# EAGLE board projetElec_groupe1 (EAGLE 8.3.1)
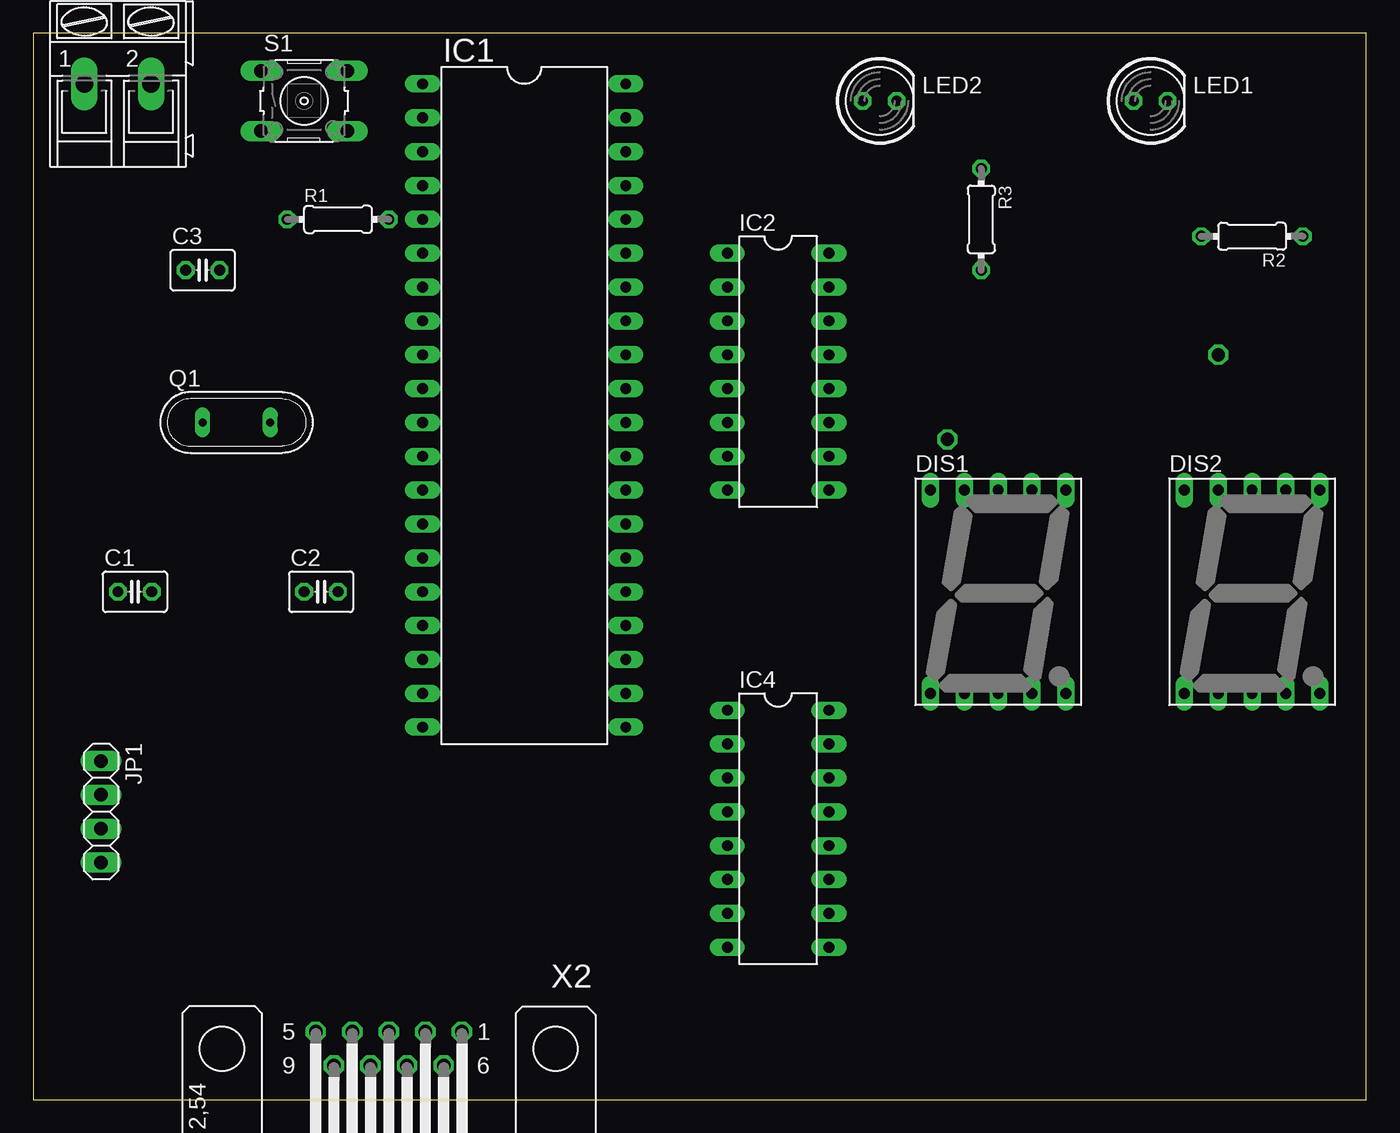
[diagram p0: board, top side]
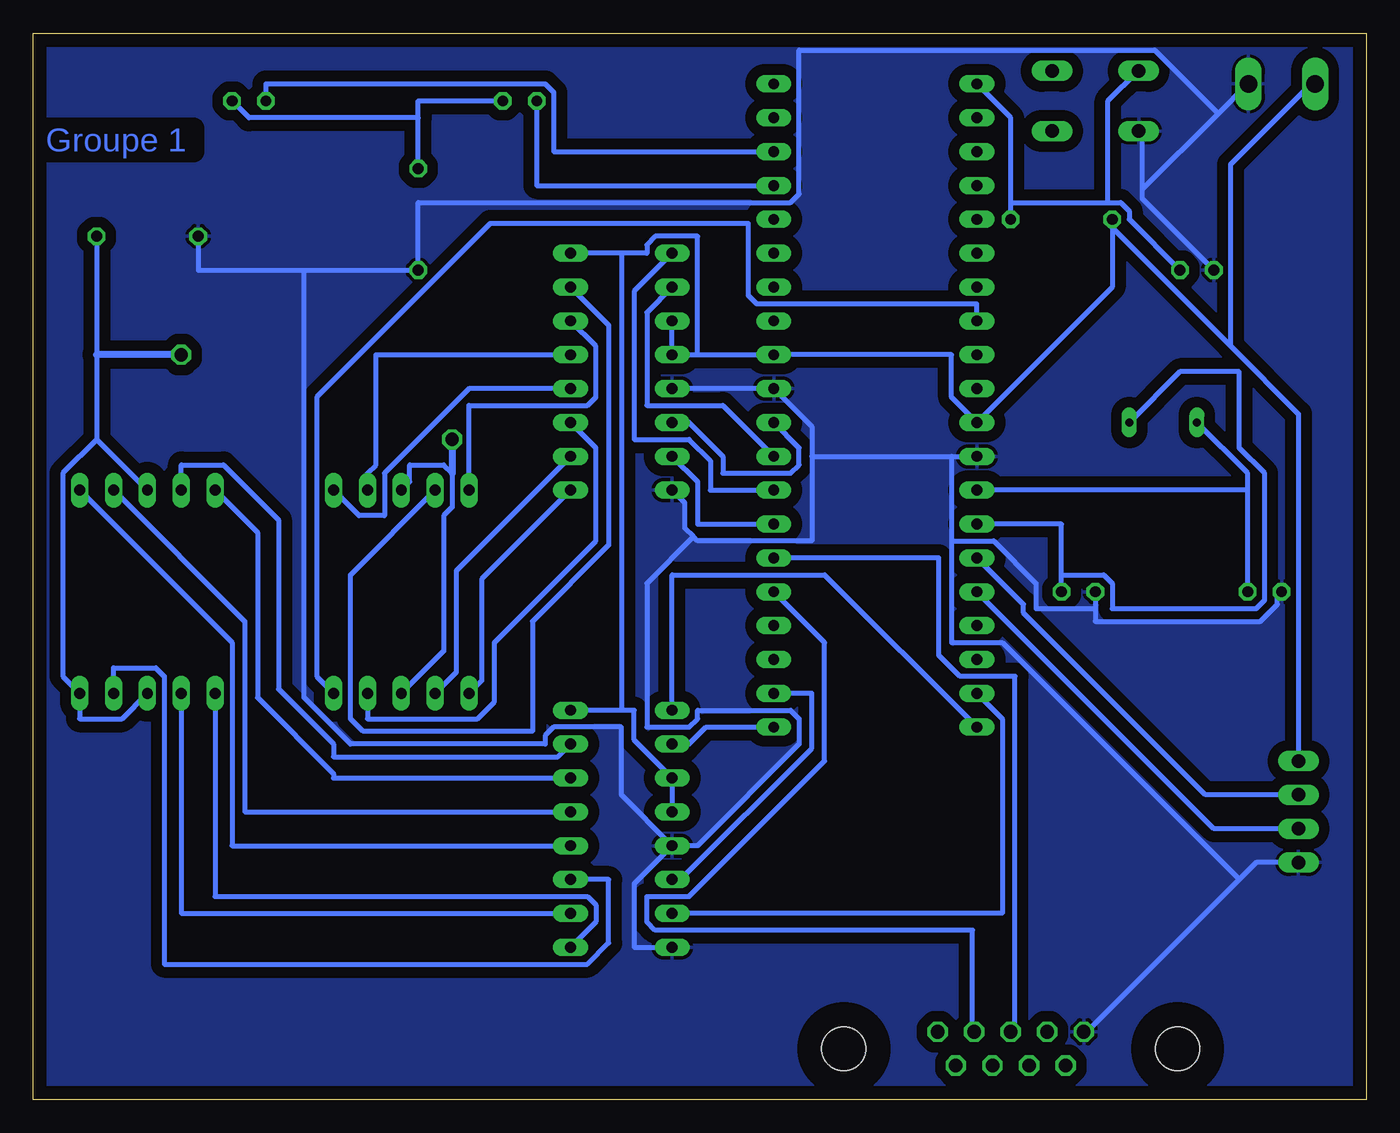
[diagram p1: board, bottom side, seen from below]

Size 100 x 80 mm. Coordinates in mm from the lower left corner, seen from the top.
Outline: 0,0 100,0 100,80 0,80 0,0
Copper layers (1*16): Top 0.035mm / dielectric 1.5mm / Bottom 0.035mm
Design rules "default *": minimum track width 15mil, minimum drill 0.35mm, track to track 15mil, track to pad 15mil, pad to pad 15mil, via to via 15mil, smd to smd 6mil, copper to edge 40mil, drill to drill 6mil, minimum pad ring 10mil, minimum via ring 8mil, stop-mask expansion 4mil, vias tented up to drill 0mil, thermal gap 10mil

## Footprints (pad centres in the part's own frame; a part is rotated, then mirrored left to right if it is on the bottom)
C025-030X050 = drill 0.813 octagon: 1 -1.27,0; 2 1.27,0
HDSP-M = drill 0.813 long: 1 -5.08,-7.62; 2 -2.54,-7.62; 3 0,-7.62; 4 2.54,-7.62; 5 5.08,-7.62; 6 5.08,7.62; 7 2.54,7.62; 8 0,7.62; 9 -2.54,7.62; 10 -5.08,7.62
DIL40 = drill 0.813 long: 1 -24.13,-7.62; 2 -21.59,-7.62; 3 -19.05,-7.62; 4 -16.51,-7.62; 5 -13.97,-7.62; 6 -11.43,-7.62; 7 -8.89,-7.62; 8 -6.35,-7.62; 9 -3.81,-7.62; 10 -1.27,-7.62; 11 1.27,-7.62; 12 3.81,-7.62; 13 6.35,-7.62; 14 8.89,-7.62; 15 11.43,-7.62; 16 13.97,-7.62; 17 16.51,-7.62; 18 19.05,-7.62; 19 21.59,-7.62; 20 24.13,-7.62; 21 24.13,7.62; 22 21.59,7.62; 23 19.05,7.62; 24 16.51,7.62; 25 13.97,7.62; 26 11.43,7.62; 27 8.89,7.62; 28 6.35,7.62; 29 3.81,7.62; 30 1.27,7.62; 31 -1.27,7.62; 32 -3.81,7.62; 33 -6.35,7.62; 34 -8.89,7.62; 35 -11.43,7.62; 36 -13.97,7.62; 37 -16.51,7.62; 38 -19.05,7.62; 39 -21.59,7.62; 40 -24.13,7.62
DIL16 = drill 0.813 long: 1 -8.89,-3.81; 2 -6.35,-3.81; 3 -3.81,-3.81; 4 -1.27,-3.81; 5 1.27,-3.81; 6 3.81,-3.81; 7 6.35,-3.81; 8 8.89,-3.81; 9 8.89,3.81; 10 6.35,3.81; 11 3.81,3.81; 12 1.27,3.81; 13 -1.27,3.81; 14 -3.81,3.81; 15 -6.35,3.81; 16 -8.89,3.81
1X04 = drill 1.016 long: 1 -3.81,0; 2 -1.27,0; 3 1.27,0; 4 3.81,0
LED5MM = drill 0.813 octagon: A -1.27,0; K 1.27,0
QS = drill 0.61 long: 1 -2.54,0; 2 2.54,0
0204/7 = drill 0.813 octagon: 1 -3.81,0; 2 3.81,0
B3F-10XX = drill 1.016 long: 1 -3.251,2.261; 2 3.251,2.261; 3 -3.251,-2.261; 4 3.251,-2.261
AK300/2 = drill 1.321 long: 1 -2.515,0; 2 2.489,0
F09H = drill 1.016 octagon: 1 -5.486,-1.27; 2 -2.743,-1.27; 3 0,-1.27; 4 2.743,-1.27; 5 5.486,-1.27; 6 -4.115,1.27; 7 -1.372,1.27; 8 1.372,1.27; 9 4.115,1.27 | hole 3.302: -12.522,0; 12.522,0

## Placement (x,y rotation side)
C1  [C025-030X050]  7.62,38.1 0 top
C2  [C025-030X050]  21.59,38.1 0 top
C3  [C025-030X050]  12.7,62.23 0 top
DIS1  HD-H101  [HDSP-M]  72.39,38.1 0 top
DIS2  HD-H101  [HDSP-M]  91.44,38.1 0 top
IC1  PIC16F877P  [DIL40]  36.83,52.07 270 top
IC2  [DIL16]  55.88,54.61 270 top
IC4  [DIL16]  55.88,20.32 270 top
JP1  [1X04]  5.08,21.59 270 top
LED1  [LED5MM]  83.82,74.93 0 top
LED2  [LED5MM]  63.5,74.93 0 top
Q1  [QS]  15.24,50.8 0 top
R1  [0204/7]  22.86,66.04 0 top
R2  [0204/7]  91.44,64.77 180 top
R3  [0204/7]  71.12,66.04 270 top
S1  [B3F-10XX]  20.32,74.93 0 top
X1  [AK300/2]  6.35,76.2 0 top
X2  [F09H]  26.67,3.81 180 top

## Library data of the parts
C1-C3 R1-R3 = resistor
DIS1 DIS2 = display-hp; OC_FARNELL: unknown; OC_NEWARK: unknown
IC1 = microchip; MF: MICROCHIP; MPN: PIC16F877-04/P; OC_FARNELL: 9761349; OC_NEWARK: 61K3463
IC2 IC4 = ic-package
JP1 = pinhead
LED1 LED2 = led
Q1 = special
S1 = switch-omron; MPN: B3F-1000; OC_FARNELL: 176432; OC_NEWARK: 36M3542
X1 = con-ptr500; OC_FARNELL: unknown; OC_NEWARK: unknown
X2 = con-subd; OC_FARNELL: unknown; OC_NEWARK: unknown

## Nets
GND: C1.1 C2.1 C3.1 IC1.12 IC1.31 IC2.5 IC2.8 IC4.5 IC4.8 JP1.4 R2.2 R3.2 S1.3 X1.2 X2.5
N$1: C1.2 IC1.13 Q1.1
N$2: C2.2 IC1.14 Q1.2
N$3: C3.2 IC1.1 R1.2 S1.1
N$4: IC1.38 LED1.A
N$5: LED1.K LED2.K R3.1
N$6: IC1.37 LED2.A
N$7: IC1.15 JP1.2
N$8: IC1.16 JP1.3
N$9: DIS1.10 IC2.14
N$10: IC1.25 X2.2
N$11: IC1.26 X2.3
N$12: IC1.28 IC2.1
N$13: IC1.29 IC2.2
N$14: IC1.30 IC2.6
N$15: DIS1.7 IC2.13
N$16: IC1.20 IC4.1
N$18: IC1.27 IC2.7
N$19: DIS1.6 IC2.12
N$20: DIS1.4 IC2.11
N$21: DIS1.2 IC2.10
N$22: DIS1.1 IC2.9
N$23: DIS1.5 IC1.8
N$24: DIS2.3 DIS2.5 DIS2.8 R2.1
N$25: DIS1.3 DIS1.8
N$27: DIS1.9 IC2.15
N$28: IC1.19 IC4.7
N$29: IC1.21 IC4.2
N$30: IC1.22 IC4.6
N$31: DIS2.7 IC4.13
N$33: DIS2.6 IC4.12
N$34: DIS2.4 IC4.11
N$35: DIS2.2 IC4.10
N$36: DIS2.1 IC4.9
N$37: DIS2.10 IC4.14
N$38: DIS2.9 IC4.15
VCC: IC1.11 IC1.32 IC2.3 IC2.4 IC2.16 IC4.3 IC4.4 IC4.16 JP1.1 R1.1 X1.1

## Tracks (layer width: path | path; a pad name or v marks a point on that pad's centre or on a via)
GND
  Bottom 0.381: 9.53,16.51 8.26,17.78 JP1.4 | 9.53,16.51 20.95,5.08 X2.5 | C3.1 16.83,67.63 16.83,68.26 | 16.83,68.26 16.83,72.39 S1.3 | 16.83,68.26 11.11,73.98 | 11.11,73.98 8.89,76.2 X1.2 | 79.69,62.23 87.63,62.23 R2.2 | 79.69,62.23 R3.2 71.12,67.31 43.18,67.31 42.55,67.94 42.55,78.74 15.88,78.74 11.11,73.98 | C1.1 6.67,37.78 6.67,37.15 7.94,35.88 20.32,35.88 20.32,36.83 | C2.1 20.32,36.83 | IC4.8 54.93,11.43 54.93,16.19 IC4.5 | IC2.8 51.12,44.77 51.12,42.86 50.48,42.23 | 50.48,42.23 50.16,41.91 41.59,41.91 41.59,48.26 | 41.59,48.26 41.59,50.48 IC1.31 IC2.5 | 41.59,48.26 31.11,48.26 | 31.11,48.26 IC1.12 | IC4.5 50.16,19.05 42.55,26.67 42.55,28.57 43.18,29.21 50.16,29.21 50.16,28.57 50.8,27.94 53.98,27.94 53.98,38.73 50.48,42.23 | 20.32,36.83 24.77,36.83 24.77,38.73 27.94,41.91 31.11,41.91 | 31.11,48.26 31.11,41.91 | 79.69,62.23 79.69,30.16 76.2,26.67 61.59,26.67 61.59,27.3 60.96,27.94 55.88,27.94 55.88,22.86 IC4.5 | 9.53,16.51 27.3,34.29 31.11,34.29 31.11,41.91
  pour Bottom (isolate 0.813): 0,80.01 100.33,80.01 100.33,0 0,0
N$1
  Bottom 0.381: Q1.1 8.89,46.99 8.89,45.72 | C1.2 8.89,45.72 | 8.89,45.72 IC1.13
N$2
  Bottom 0.381: Q1.2 13.97,54.61 9.53,54.61 9.53,48.9 7.62,46.99 7.62,37.47 8.26,36.83 19.05,36.83 19.05,38.73 19.68,39.37 22.86,39.37 | C2.2 22.86,39.37 | IC1.14 22.86,43.18 22.86,39.37
N$3
  Bottom 0.381: C3.2 17.78,66.04 17.78,66.67 18.41,67.31 19.37,67.31 | 26.67,67.31 19.37,67.31 | R1.2 26.67,67.31 | IC1.1 26.67,73.66 26.67,67.31 | 19.37,67.31 19.37,74.93 17.14,77.15 S1.1
N$4
  Bottom 0.381: IC1.38 60.96,71.12 60.96,75.56 61.59,76.2 82.55,76.2 LED1.A
N$5
  Bottom 0.381: LED2.K 71.12,74.93 71.12,73.66 | R3.1 71.12,73.66 | LED1.K 83.82,73.66 71.12,73.66
N$6
  Bottom 0.381: IC1.37 62.23,68.58 LED2.A
N$7
  Bottom 0.381: IC1.15 25.72,37.15 25.72,36.51 12.06,22.86 JP1.2
N$8
  Bottom 0.381: IC1.16 11.43,20.32 JP1.3
N$9
  Bottom 0.381: IC2.14 57.78,56.52 57.78,52.7 58.42,52.07 67.31,52.07 DIS1.10
N$10
  Bottom 0.381: IC1.25 40.64,34.29 40.64,25.4 50.8,15.24 53.98,15.24 53.98,13.34 53.34,12.7 29.53,12.7 29.53,5.08 X2.2
N$11
  Bottom 0.381: IC1.26 32.07,40.64 32.07,33.34 30.48,31.75 26.35,31.75 26.35,5.4 X2.3
N$12
  Bottom 0.381: IC1.28 49.21,45.72 49.21,47.94 50.8,49.53 54.93,49.53 54.93,60.64 IC2.1
N$13
  Bottom 0.381: IC1.29 48.26,52.07 53.98,52.07 53.98,59.05 IC2.2
N$14
  Bottom 0.381: IC1.30 42.55,48.9 42.55,47.62 43.18,46.99 48.26,46.99 48.26,48.26 50.8,50.8 IC2.6
N$15
  Bottom 0.381: IC2.13 74.3,55.88 74.3,47.62 74.93,46.99 DIS1.7
N$16
  Bottom 0.381: IC1.20 40.64,39.37 52.07,39.37 IC4.1
N$18
  Bottom 0.381: IC1.27 50.16,43.18 50.16,46.35 IC2.7
N$19
  Bottom 0.381: DIS1.6 75.56,43.81 73.66,43.81 73.66,46.99 67.31,53.34 IC2.12
N$20
  Bottom 0.381: IC2.11 57.78,48.9 57.78,41.91 65.41,34.29 65.41,29.84 66.67,28.57 74.93,28.57 DIS1.4
N$21
  Bottom 0.381: IC2.10 68.26,39.69 68.26,32.07 DIS1.2
N$22
  Bottom 0.381: DIS1.1 66.36,31.43 66.36,39.05 IC2.9
N$23
  Bottom 0.381: DIS1.5 78.74,31.75 78.74,52.7 65.72,65.72 46.35,65.72 46.35,60.33 45.72,59.69 29.21,59.69 IC1.8
N$24  (via drill 1 pad 0.85)
  Bottom 0.381: DIS2.3 93.34,28.57 96.52,28.57 DIS2.5 97.79,31.75 97.79,46.99 95.25,49.53 | 95.25,49.53 DIS2.8 | R2.1 95.25,55.88 95.25,49.53
  Bottom 0.508: v88.9,55.88 95.25,55.88
N$25  (via drill 1 pad 0.85)
  Bottom 0.381: DIS1.3 69.22,33.66 69.22,43.81 68.58,44.45 68.58,46.99 69.22,47.62 71.75,47.62 71.75,46.35 DIS1.8
  Bottom 0.508: v68.58,49.53 68.58,46.99
N$27
  Bottom 0.381: DIS1.9 76.2,39.37 76.2,28.57 75.25,27.62 62.55,27.62 62.55,35.88 56.83,41.59 56.83,58.1 IC2.15
N$28
  Bottom 0.381: IC4.7 27.3,13.97 27.3,28.57 IC1.19
N$29
  Bottom 0.381: IC1.21 49.53,27.94 50.8,26.67 IC4.2
N$30
  Bottom 0.381: IC1.22 41.59,30.48 41.59,26.35 51.44,16.51 IC4.6
N$31
  Bottom 0.381: IC4.13 84.14,21.59 84.14,35.88 DIS2.7
N$33
  Bottom 0.381: IC4.12 85.09,19.05 85.09,34.29 DIS2.6
N$34
  Bottom 0.381: IC4.11 56.83,16.51 56.83,11.75 58.42,10.16 90.17,10.16 90.17,31.75 90.81,32.38 93.98,32.38 DIS2.4
N$35
  Bottom 0.381: IC4.10 88.9,13.97 DIS2.2
N$36
  Bottom 0.381: IC4.9 57.78,13.34 57.78,14.61 58.42,15.24 86.36,15.24 DIS2.1
N$37
  Bottom 0.381: IC4.14 77.47,24.13 77.47,24.45 83.19,30.16 83.19,42.55 DIS2.10
N$38
  Bottom 0.381: IC4.15 60.64,25.72 77.47,25.72 77.47,26.67 81.6,30.8 81.6,43.5 85.72,47.62 88.9,47.62 DIS2.9
VCC
  Bottom 0.381: IC4.4 IC4.3 54.93,26.99 54.93,29.21 55.88,29.21 | 55.88,29.21 IC4.16 | 50.16,55.88 IC2.4 IC2.3 | 50.16,55.88 IC1.32 31.11,55.88 31.11,52.7 IC1.11 19.05,60.96 19.05,65.41 | 55.88,63.5 53.98,63.5 53.98,64.14 53.34,64.77 50.16,64.77 50.16,55.88 | 55.88,63.5 IC2.16 | 55.88,63.5 55.88,29.21 | JP1.1 5.08,51.44 10.16,56.52 | 19.05,65.41 10.16,56.52 | 19.05,65.41 R1.1 | 10.16,56.52 10.16,70.17 4.13,76.2 X1.1

## Text on the board
Bottom: Groupe 1